# EAGLE board TSC_PROJECT_1_v12 (EAGLE 9.7.0)
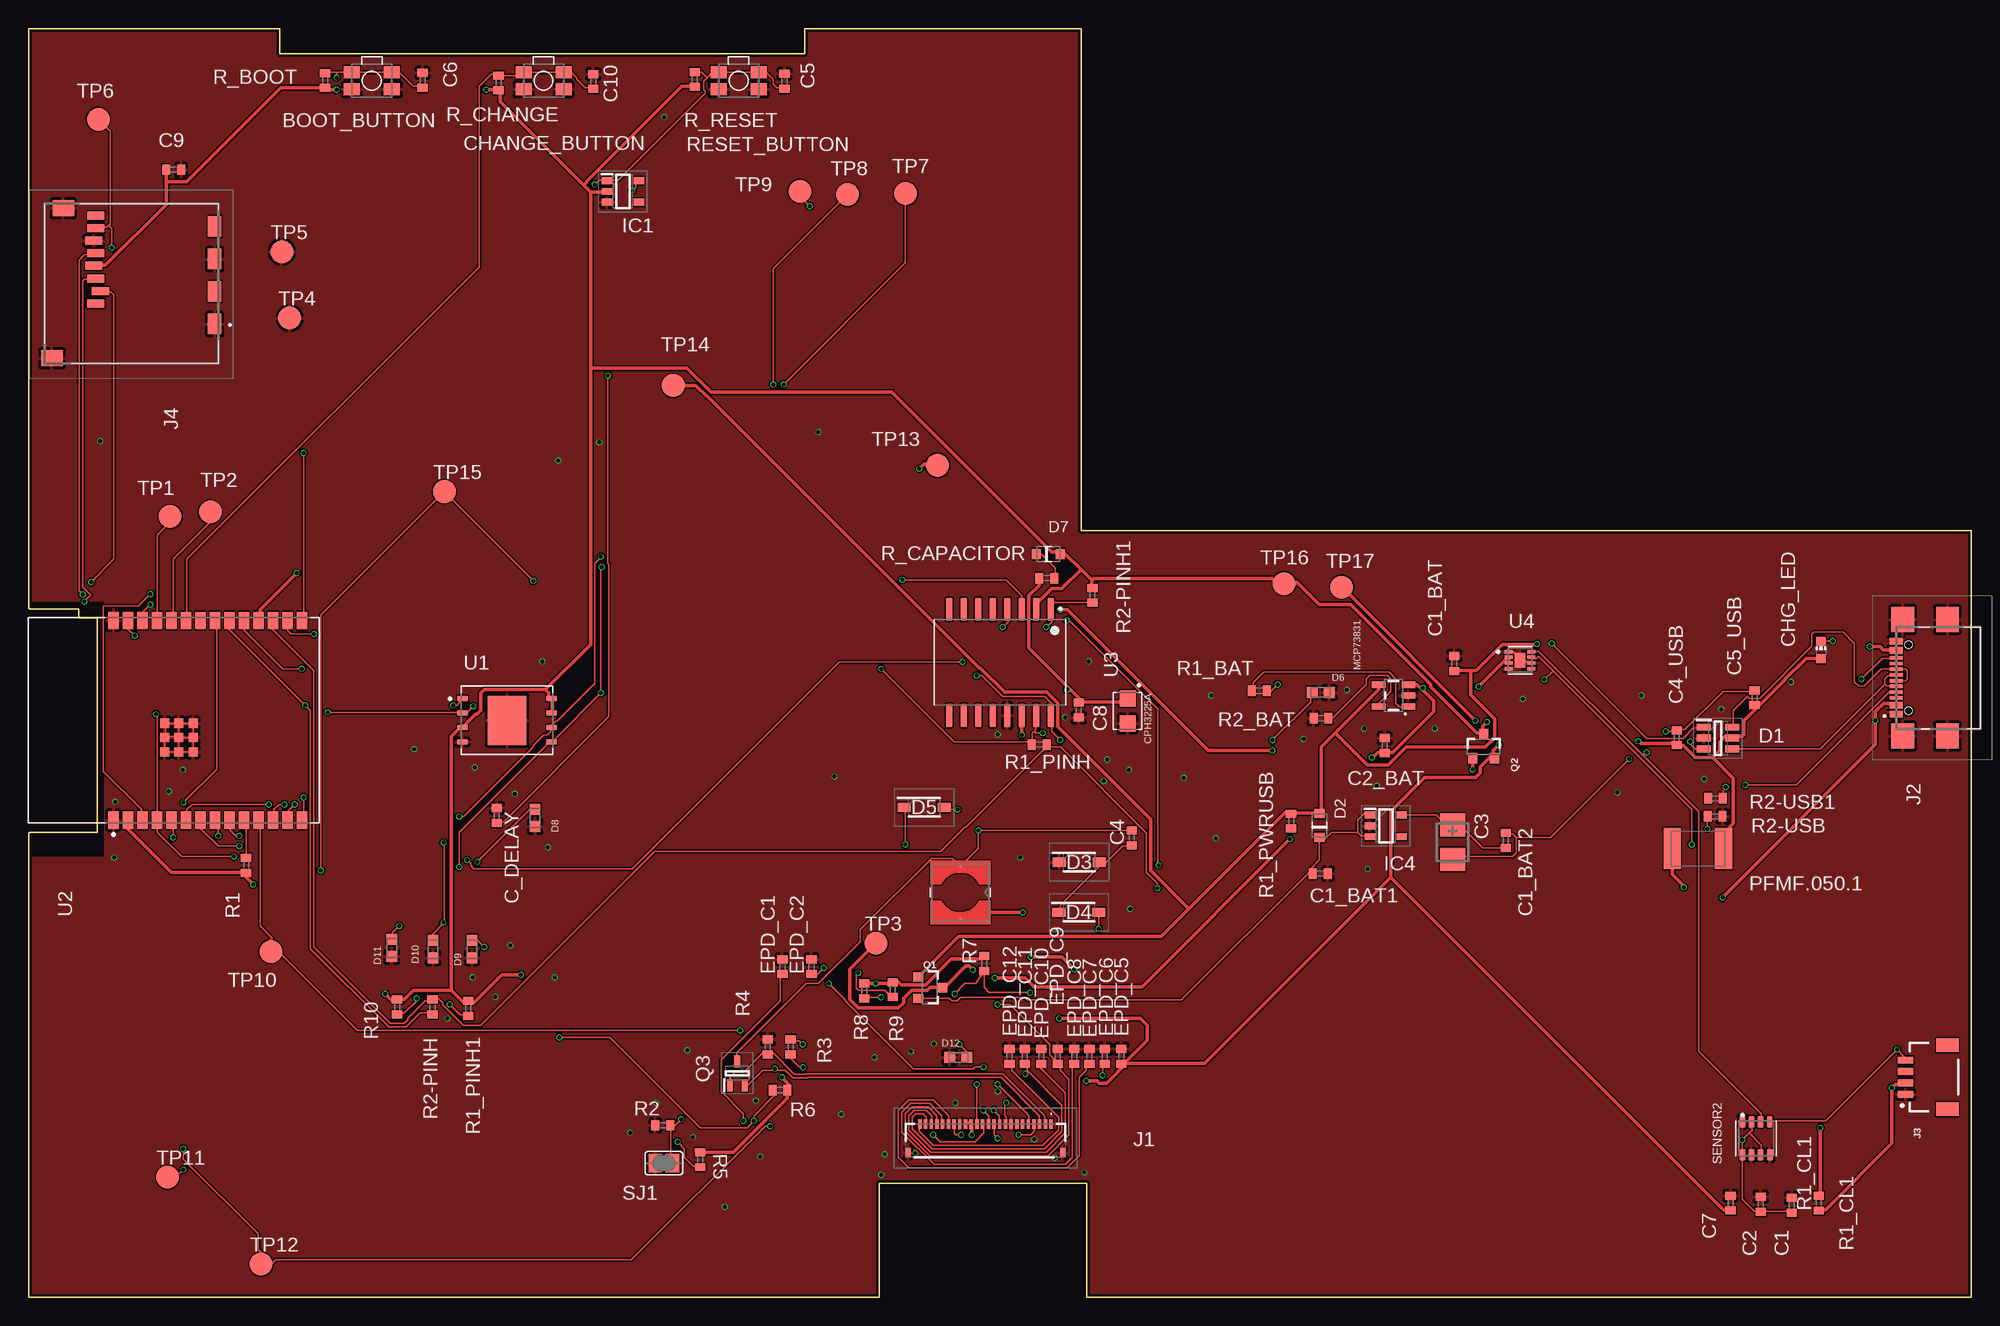
[diagram p0: board, top side]
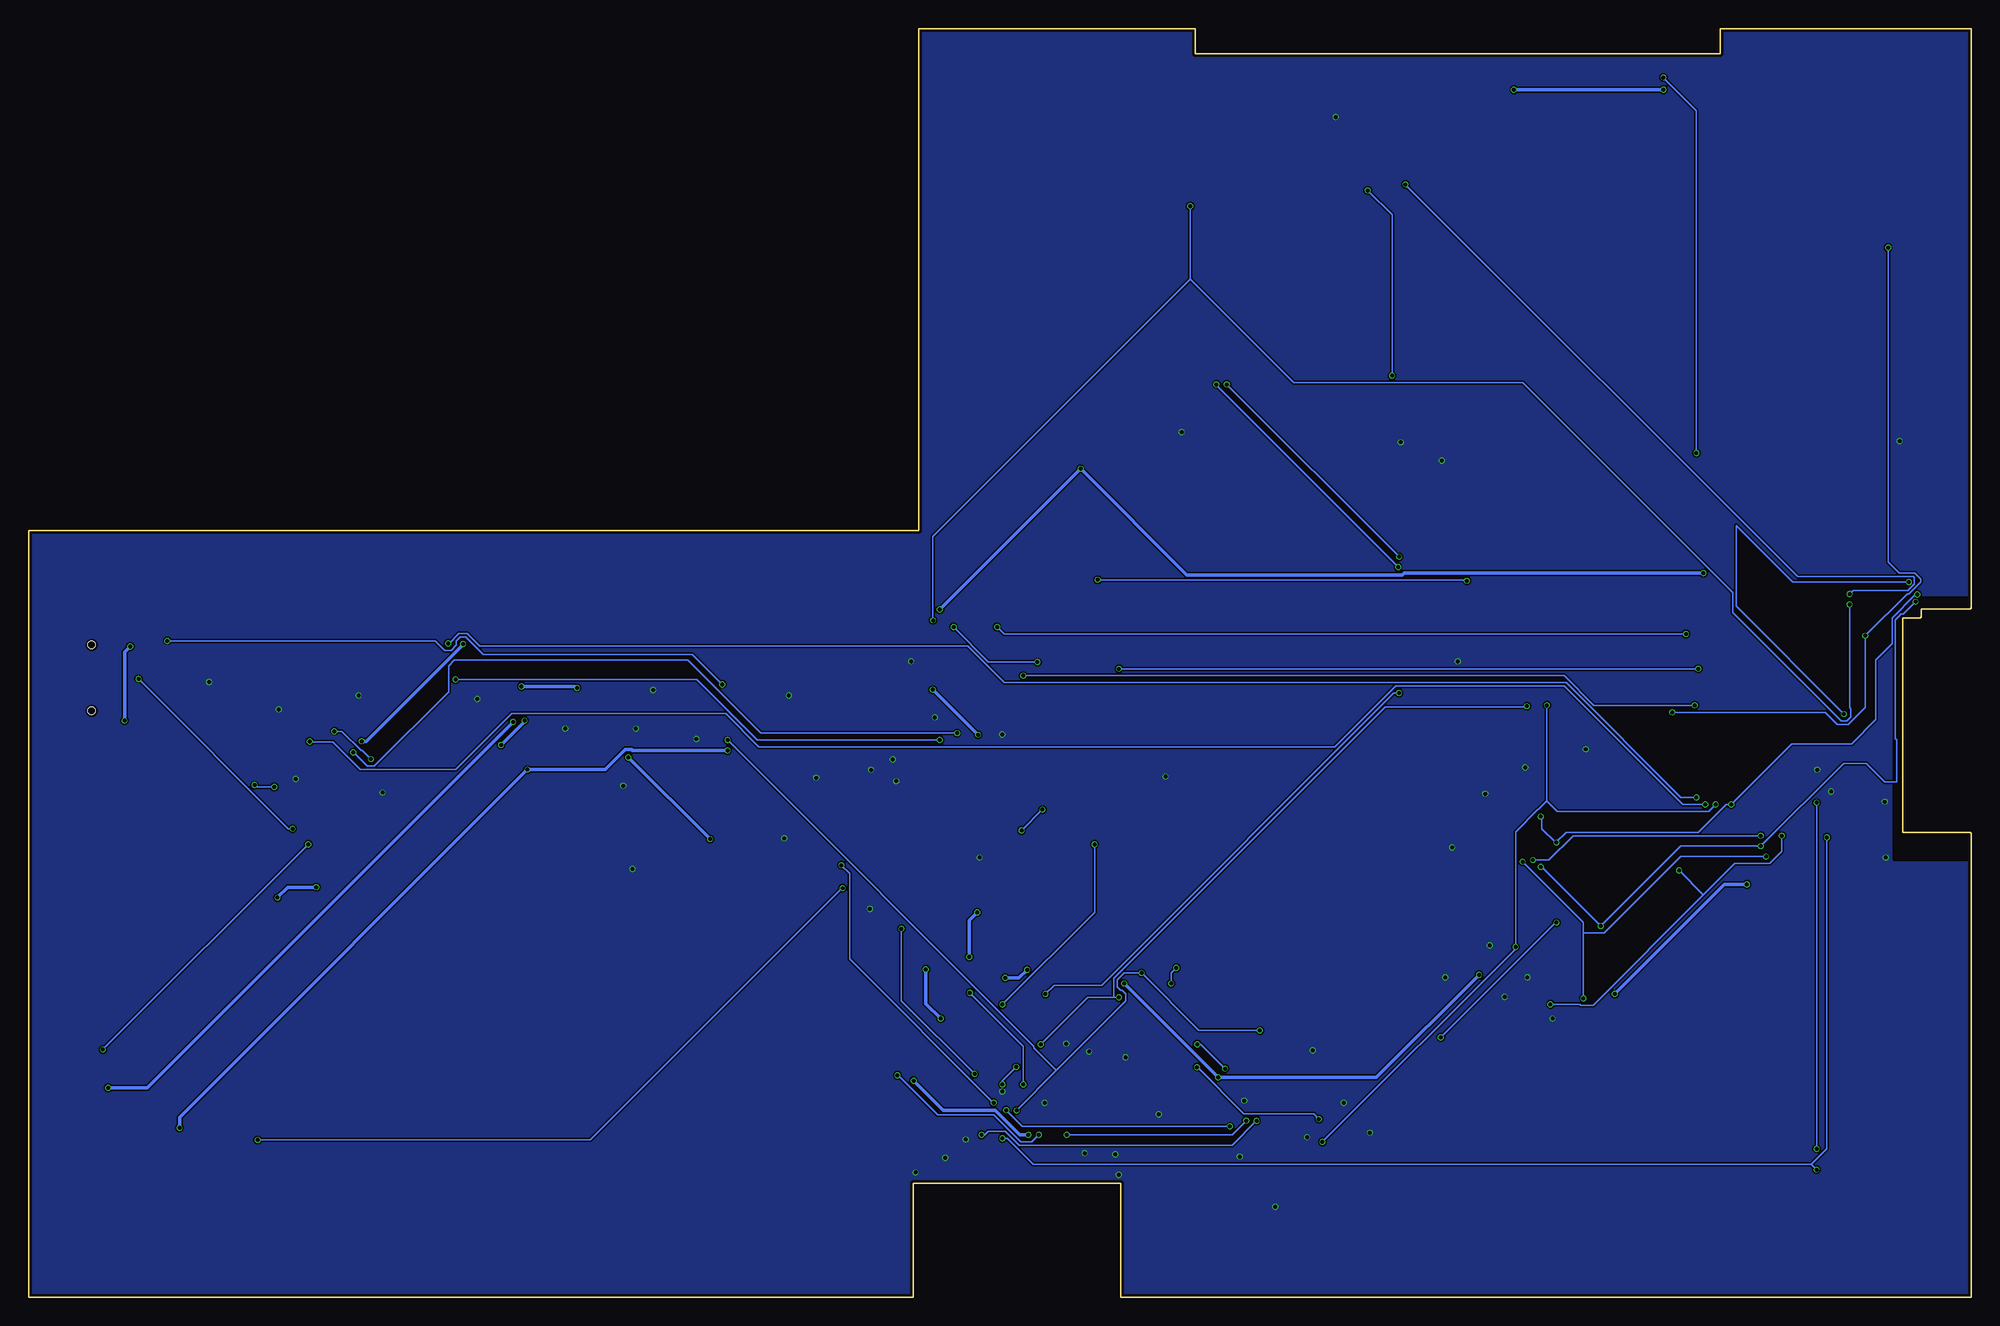
[diagram p1: board, bottom side, seen from below]

Size 170.21 x 111.2 mm. Coordinates in mm from the lower left corner, seen from the top.
Outline: 0.01,111.2 22.01,111.2 22.01,108.99 68.01,108.99 68.01,111.2 92.21,111.2 92.21,67.2 170.21,67.2 170.21,0 92.72,0 92.71,10 74.51,10 74.51,0 0.01,0 0,39.94 0,40.64 0.1,40.74 6,40.74 6,59.54 4.5,59.54 4.4,59.64 4.4,60.34 0.1,60.34 0.01,60.43 0.01,111.2
Copper layers (1*16): Top 0.035mm / dielectric 1.6mm / Bottom 0.035mm
Design rules "jlcpcb-2layers": minimum track width 5mil, minimum drill 0.3mm, track to track 5mil, track to pad 5mil, pad to pad 5mil, via to via 5mil, smd to smd 5mil, copper to edge 0.2mm, drill to drill 6mil, minimum pad ring 10mil, minimum via ring 3mil, stop-mask expansion 4mil, vias tented up to drill 0mil, thermal gap 10mil

## Footprints (pad centres in the part's own frame; a part is rotated, then mirrored left to right if it is on the bottom)
MYBUTTON = smd 1.4 x 1.05: 1 1.75,0.75; 2 -1.75,0.75; 3 -1.75,-0.75; 4 1.75,-0.75
EAGLE-LTSPICE_C0402 = smd 0.7 x 0.9: 1 -0.65,0; 2 0.65,0
RCL_CT3528 = smd 2 x 2.2: + -1.5,0; - 1.5,0
ADAFRUIT_CHIP-LED0603 = smd 0.8 x 0.8: A 0,-0.75; C 0,0.75
CAPCP3225X100N = smd 1.4 x 1.4: 1 -1.1,0; 2 1.1,0
SOT95P280X145-6N = smd 1.2 x 0.6: 1 -1.25,0.95; 2 -1.25,0; 3 -1.25,-0.95; 4 1.25,-0.95; 5 1.25,0; 6 1.25,0.95
ESP32_WROVER_AVX---SD0805S020S1R0_AVX_SD0805S020S1R0_0 = smd 0.8 x 0.9: 1 -1.05,0; 2 1.05,0
SOD3716X135N = smd 1.15 x 0.8: 1 -1.75,0; 2 1.75,0
DIOC1608X36N = smd 0.97 x 0.94: 1 -0.75,0; 2 0.75,0
SOT95P280X125-5N = smd 0.9 x 0.6: 1 -1.4,0.95; 2 -1.4,0; 3 -1.4,-0.95; 4 1.4,-0.95; 5 1.4,0.95
SOT95P280X120-5N = smd 0.9 x 0.6: 1 -1.4,0.95; 2 -1.4,0; 3 -1.4,-0.95; 4 1.4,-0.95; 5 1.4,0.95
FH34SRJ24S05SH99 = smd 0.3 x 0.8: 1 5.75,1.45; 2 5.25,1.45; 3 4.75,1.45; 4 4.25,1.45; 5 3.75,1.45; 6 3.25,1.45; 7 2.75,1.45; 8 2.25,1.45; 9 1.75,1.45; 10 1.25,1.45; 11 0.75,1.45; 12 0.25,1.45; 13 -0.25,1.45; 14 -0.75,1.45; 15 -1.25,1.45; 16 -1.75,1.45; 17 -2.25,1.45; 18 -2.75,1.45; 19 -3.25,1.45; 20 -3.75,1.45; 21 -4.25,1.45; 22 -4.75,1.45; 23 -5.25,1.45; 24 -5.75,1.45 | smd 0.4 x 0.8: MP1 6.75,-1.05; MP2 -6.75,-1.05
SAMACSYS_PARTS_USB4110GFA = smd 0.3 x 1.15: A1 -3.35,3.678; A4 -2.55,3.678; A5 -1.25,3.678; A6 -0.25,3.678; A7 0.25,3.678; A8 1.25,3.678; A9 2.55,3.678; A12 3.35,3.678; B1 3.05,3.678; B4 2.25,3.678; B5 1.75,3.678; B6 0.75,3.678; B7 -0.75,3.678; B8 -1.75,3.678; B9 -2.25,3.678; B12 -3.05,3.678 | smd 2.18 x 2: MP1 -5.11,-0.827; MP2 5.11,-0.827; MP3 -5.11,3.103; MP4 5.11,3.103 | hole 0.65: -2.89,2.603; 2.89,2.603
JST04_1MM_RA = smd 0.6 x 1.35: 1 -1.5,0; 2 -0.5,0; 3 0.5,0; 4 1.5,0 | smd 1.2 x 2: NC1 2.8,-3.675; NC2 -2.8,-3.675
112ATAARR03ATTEND = smd 1.8 x 1.2: G1 10.6,10.4; G2 4.9,10.4; S1 7.75,10.4; S2 2.05,10.4 | smd 1.4 x 1.9: G3 13.6,-3.85; G4 0.45,-2.85 | smd 0.7 x 1.5: P1 8.8,0; P2 7.7,0.4; P3 6.6,0; P4 5.5,-0.2; P5 4.4,0; P6 3.3,-0.2; P7 2.2,0; P8 1.1,0
IND_4828-WE-TPC_WRE = smd 0.127 x 0.127: 1 -2.286,0; 2 2.286,0
ESP32_WROVER_SPARKFUN-IC-POWER_SOT23-5 = smd 0.55 x 1.2: 1 -0.95,-1.3; 2 0,-1.3; 3 0.95,-1.3; 4 0.95,1.3; 5 -0.95,1.3
ESP32C6_VARISTOR_CT/CN1812 = smd 1.5 x 3.6: 1 -2.25,0; 2 2.25,0
ESP32_WROVER_SPARKFUN-DISCRETESEMI_SOT23-3 = smd 0.8 x 0.9: 1 -0.95,-1; 2 0.95,-1; 3 0,1.1
SOT65P210X110-3N = smd 1.05 x 0.5: 1 -1.05,0.65; 2 -1.05,-0.65; 3 1.05,0
ESP32_WROVER_EAGLE-LTSPICE_R0402 = smd 0.7 x 0.9: 1 -0.65,0; 2 0.65,0
ESP32_WROVER_BME680_PSON80P300X300X100-8N = smd 1.016 x 0.5: 1 1.458,1.2; 2 1.458,0.4; 3 1.458,-0.4; 4 1.458,-1.2; 5 -1.458,-1.22; 6 -1.458,-0.4; 7 -1.458,0.4; 8 -1.458,1.2
SJ = smd 1.168 x 1.6: 1 -0.762,0; 2 0.762,0
TP20R = smd 2 x 2: TP 0,0
SON127P600X800X80-9N = smd 0.94 x 0.44: 1 -3.895,1.905; 2 -3.895,0.635; 3 -3.895,-0.635; 4 -3.895,-1.905; 5 3.895,-1.905; 6 3.895,-0.635; 7 3.895,0.635; 8 3.895,1.905 | smd 3.4 x 4.3: 9 0,0
XCVR_ESP32-C6-WROOM-1-N8 = smd 1.5 x 0.9: 1 -8.75,5.26; 2 -8.75,3.99; 3 -8.75,2.72; 4 -8.75,1.45; 5 -8.75,0.18; 6 -8.75,-1.09; 7 -8.75,-2.36; 8 -8.75,-3.63; 9 -8.75,-4.9; 10 -8.75,-6.17; 11 -8.75,-7.44; 12 -8.75,-8.71; 13 -8.75,-9.98; 14 -8.75,-11.25; 15 8.75,-11.25; 16 8.75,-9.98; 17 8.75,-8.71; 18 8.75,-7.44; 19 8.75,-6.17; 20 8.75,-4.9; 21 8.75,-3.63; 22 8.75,-2.36; 23 8.75,-1.09; 24 8.75,0.18; 25 8.75,1.45; 26 8.75,2.72; 27 8.75,3.99; 28 8.75,5.26 | smd 0.8 x 0.8: 29_1 -2.755,0.79; 29_2 -1.505,0.79; 29_3 -0.255,0.79; 29_4 -2.755,-0.46; 29_5 -1.505,-0.46; 29_6 -0.255,-0.46; 29_7 -2.755,-1.71; 29_8 -1.505,-1.71; 29_9 -0.255,-1.71
SOIC127P1032X265-16N = smd 2.05 x 0.59: 1 -4.655,4.445; 2 -4.655,3.175; 3 -4.655,1.905; 4 -4.655,0.635; 5 -4.655,-0.635; 6 -4.655,-1.905; 7 -4.655,-3.175; 8 -4.655,-4.445; 9 4.655,-4.445; 10 4.655,-3.175; 11 4.655,-1.905; 12 4.655,-0.635; 13 4.655,0.635; 14 4.655,1.905; 15 4.655,3.175; 16 4.655,4.445
SON50P200X200X80-9N = smd 0.76 x 0.27: 1 -0.985,0.75; 2 -0.985,0.25; 3 -0.985,-0.25; 4 -0.985,-0.75; 5 0.985,-0.75; 6 0.985,-0.25; 7 0.985,0.25; 8 0.985,0.75 | smd 0.9 x 1.3: 9 0,0

## Placement (x,y rotation side)
BOOT_BUTTON  BUTTON_CUSYOMV1  [MYBUTTON]  30.07,106.62 180 top
C1  [EAGLE-LTSPICE_C0402]  154.46,8.07 90 top
C1_BAT  [EAGLE-LTSPICE_C0402]  124.9,55.56 90 top
C1_BAT1  [EAGLE-LTSPICE_C0402]  113.17,37.14 0 top
C1_BAT2  [EAGLE-LTSPICE_C0402]  129.41,40.04 90 top
C2  [EAGLE-LTSPICE_C0402]  151.75,8.17 90 top
C2_BAT  [EAGLE-LTSPICE_C0402]  118.81,48.36 90 top
C3  [RCL_CT3528]  124.76,39.89 270 top
C4  [EAGLE-LTSPICE_C0402]  96.64,40.27 90 top
C4_USB  [EAGLE-LTSPICE_C0402]  144.4,49.05 90 top
C5  [EAGLE-LTSPICE_C0402]  66.23,106.57 90 top
C5_USB  [EAGLE-LTSPICE_C0402]  151.21,52.55 90 top
C6  [EAGLE-LTSPICE_C0402]  34.52,106.67 90 top
C7  [EAGLE-LTSPICE_C0402]  149.11,8.27 90 top
C8  [EAGLE-LTSPICE_C0402]  92,51.47 270 top
C9  [EAGLE-LTSPICE_C0402]  12.71,98.83 0 top
C10  [EAGLE-LTSPICE_C0402]  49.47,106.56 90 top
C_DELAY  [EAGLE-LTSPICE_C0402]  41.01,42.24 90 top
CHANGE_BUTTON  BUTTON_CUSYOMV1  [MYBUTTON]  45.12,106.62 180 top
CHG_LED  [ADAFRUIT_CHIP-LED0603]  157.03,56.74 0 top
CPH3225A  CPH3225A  [CAPCP3225X100N]  96.28,51.39 270 top
D1  USBLC6-2SC6Y  [SOT95P280X145-6N]  148,49.02 0 top
D2  ESP32_WROVER_AVX---SD0805S020S1R0_AVX_SD0805S020S1R0_0_0AVX_SD0805S020S1R0_0_0  [ESP32_WROVER_AVX---SD0805S020S1R0_AVX_SD0805S020S1R0_0]  113.09,41.35 90 top
D3  MBR0530  [SOD3716X135N]  92.05,38.14 0 top
D4  MBR0530  [SOD3716X135N]  92.02,33.75 0 top
D5  MBR0530  [SOD3716X135N]  78.46,42.95 0 top
D6  PGB1010603MR  [DIOC1608X36N]  113.2,53.02 180 top
D7  ESP32_WROVER_AVX---SD0805S020S1R0_AVX_SD0805S020S1R0_0_0AVX_SD0805S020S1R0_0_0  [ESP32_WROVER_AVX---SD0805S020S1R0_AVX_SD0805S020S1R0_0]  89.34,65.15 0 top
D8  PGB1010603MR  [DIOC1608X36N]  44.38,42.02 90 top
D9  PGB1010603MR  [DIOC1608X36N]  38.86,30.52 90 top
D10  PGB1010603MR  [DIOC1608X36N]  35.44,30.52 90 top
D11  PGB1010603MR  [DIOC1608X36N]  31.82,30.62 90 top
D12  PGB1010603MR  [DIOC1608X36N]  81.45,21.03 0 top
EPD_C1  [EAGLE-LTSPICE_C0402]  66.05,28.98 90 top
EPD_C2  [EAGLE-LTSPICE_C0402]  68.59,28.98 90 top
EPD_C5  [EAGLE-LTSPICE_C0402]  95.72,21.13 90 top
EPD_C6  [EAGLE-LTSPICE_C0402]  94.28,21.13 90 top
EPD_C7  [EAGLE-LTSPICE_C0402]  92.94,21.13 90 top
EPD_C8  [EAGLE-LTSPICE_C0402]  91.6,21.13 90 top
EPD_C9  [EAGLE-LTSPICE_C0402]  90.16,21.13 90 top
EPD_C10  [EAGLE-LTSPICE_C0402]  88.72,21.13 90 top
EPD_C11  [EAGLE-LTSPICE_C0402]  87.28,21.13 90 top
EPD_C12  [EAGLE-LTSPICE_C0402]  85.94,21.13 90 top
IC1  BD5229G-TR  [SOT95P280X125-5N]  52.07,96.92 0 top
IC4  XC6220A331MR-G  [SOT95P280X120-5N]  118.91,41.32 0 top
J1  FH34SRJ-24S-0.5SH_99_  [FH34SRJ24S05SH99]  83.83,13.74 0 top
J2  SAMACSYS_PARTS_USB4110-GF-A  [SAMACSYS_PARTS_USB4110GFA]  167.29,54.3 90 top
J3  QWIIC_RIGHT_ANGLE  [JST04_1MM_RA]  164.44,19.3 90 top
J4  112A-TAAR-R03_ATTEND  [112ATAARR03ATTEND]  5.9,95.9 270 top
L1  744043680IND_4828-WE-TPC_WRE  [IND_4828-WE-TPC_WRE]  81.63,35.49 270 top
MCP73831  ESP32_WROVER_SPARKFUN-IC-POWER_MCP73831  [ESP32_WROVER_SPARKFUN-IC-POWER_SOT23-5]  119.58,52.74 90 top
PFMF.050.1  ESP32C6_VARISTORCN1812  [ESP32C6_VARISTOR_CT/CN1812]  146.24,39.33 0 top
Q1  20V/4.2A/52mΩ/1.4W  [ESP32_WROVER_SPARKFUN-DISCRETESEMI_SOT23-3]  78.95,27.15 270 top
Q2  20V/4.2A/52mΩ/1.4W  [ESP32_WROVER_SPARKFUN-DISCRETESEMI_SOT23-3]  127.47,48.25 0 top
Q3  SI1308EDL-T1-GE3  [SOT65P210X110-3N]  62.09,19.65 90 top
R1  [ESP32_WROVER_EAGLE-LTSPICE_R0402]  19.06,37.87 90 top
R1_BAT  [ESP32_WROVER_EAGLE-LTSPICE_R0402]  107.82,53.16 0 top
R1_CL1  [ESP32_WROVER_EAGLE-LTSPICE_R0402]  156.84,8.26 90 top
R1_PINH  [ESP32_WROVER_EAGLE-LTSPICE_R0402]  88.55,48.44 0 top
R1_PINH1  [ESP32_WROVER_EAGLE-LTSPICE_R0402]  38.52,25.33 90 top
R1_PWRUSB  [ESP32_WROVER_EAGLE-LTSPICE_R0402]  110.61,41.73 90 top
R2  [ESP32_WROVER_EAGLE-LTSPICE_R0402]  55.57,15.07 0 top
R2-PINH  [ESP32_WROVER_EAGLE-LTSPICE_R0402]  35.39,25.45 90 top
R2-PINH1  [ESP32_WROVER_EAGLE-LTSPICE_R0402]  93.2,61.53 90 top
R2-USB  [ESP32_WROVER_EAGLE-LTSPICE_R0402]  147.75,42.16 0 top
R2-USB1  [ESP32_WROVER_EAGLE-LTSPICE_R0402]  147.79,43.74 0 top
R2_BAT  [ESP32_WROVER_EAGLE-LTSPICE_R0402]  113.23,50.76 0 top
R3  [ESP32_WROVER_EAGLE-LTSPICE_R0402]  66.76,21.97 270 top
R4  [ESP32_WROVER_EAGLE-LTSPICE_R0402]  64.75,21.97 90 top
R5  [ESP32_WROVER_EAGLE-LTSPICE_R0402]  58.84,12.07 90.7 top
R6  [ESP32_WROVER_EAGLE-LTSPICE_R0402]  65.83,18.17 0 top
R7  [ESP32_WROVER_EAGLE-LTSPICE_R0402]  83.72,29.27 90 top
R8  [ESP32_WROVER_EAGLE-LTSPICE_R0402]  73.21,26.87 90 top
R9  [ESP32_WROVER_EAGLE-LTSPICE_R0402]  75.7,26.97 90 top
R10  [ESP32_WROVER_EAGLE-LTSPICE_R0402]  32.29,25.46 90 top
R_BOOT  [ESP32_WROVER_EAGLE-LTSPICE_R0402]  25.98,106.65 90 top
R_CAPACITOR  [ESP32_WROVER_EAGLE-LTSPICE_R0402]  89.21,63.03 0 top
R_CHANGE  [ESP32_WROVER_EAGLE-LTSPICE_R0402]  41.18,106.43 90 top
R_RESET  [ESP32_WROVER_EAGLE-LTSPICE_R0402]  58.36,106.73 90 top
RESET_BUTTON  BUTTON_CUSYOMV1  [MYBUTTON]  62.21,106.62 180 top
SENSOR2  ESP32_WROVER_BME680_BME680  [ESP32_WROVER_BME680_PSON80P300X300X100-8N]  151.34,13.94 90 top
SJ1  [SJ]  55.66,11.77 0 top
TP1  TPTP20R  [TP20R]  12.41,68.44 0 top
TP2  TPTP20R  [TP20R]  15.93,68.84 0 top
TP3  TPTP20R  [TP20R]  74.25,31.04 0 top
TP4  TPTP20R  [TP20R]  22.87,85.84 0 top
TP5  TPTP20R  [TP20R]  22.19,91.64 0 top
TP6  TPTP20R  [TP20R]  6.11,103.24 0 top
TP7  TPTP20R  [TP20R]  76.83,96.74 0 top
TP8  TPTP20R  [TP20R]  71.75,96.64 0 top
TP9  TPTP20R  [TP20R]  67.57,96.94 0 top
TP10  TPTP20R  [TP20R]  21.23,30.32 0 top
TP11  TPTP20R  [TP20R]  12.19,10.54 0 top
TP12  TPTP20R  [TP20R]  20.38,2.92 0 top
TP13  TPTP20R  [TP20R]  79.63,72.92 0 top
TP14  TPTP20R  [TP20R]  56.48,79.92 0 top
TP15  TPTP20R  [TP20R]  36.43,70.62 0 top
TP16  TPTP20R  [TP20R]  109.99,62.54 0 top
TP17  TPTP20R  [TP20R]  115.04,62.24 0 top
U1  W25Q512JVEIQ  [SON127P600X800X80-9N]  41.92,50.57 0 top
U2  ESP32-C6-WROOM-1-N8  [XCVR_ESP32-C6-WROOM-1-N8]  12.71,50.57 90 top
U3  DS3231SN#  [SOIC127P1032X265-16N]  85.1,55.65 270 top
U4  MAX17048G+T10  [SON50P200X200X80-9N]  130.67,55.84 0 top

## Library data of the parts
BOOT_BUTTON CHANGE_BUTTON CHG_LED PFMF.050.1 RESET_BUTTON SJ1 TP1-TP17 = DeskAssistant v19 v1
C1 C1_BAT C1_BAT1 C1_BAT2 C2 C2_BAT C4 C4_USB C5 C5_USB C6-C10 C_DELAY EPD_C1 EPD_C2 EPD_C5-EPD_C12 = DeskAssistant v19 v1; SPICEMODEL: NONE; SPICEPREFIX: C
C3 = DeskAssistant v19 v1; SPICEPREFIX: C
CPH3225A = DeskAssistant v19 v1; AVAILABILITY: Not in stock; CHECK_PRICES: https://www.snapeda.com/parts/CPH3225A/Seiko+Instruments/view-part/?ref=eda; DESCRIPTION: 11 mF (EDLC) Supercapacitor 3.3 V 1210 (3225 Metric) - -; MF: Seiko Instruments; MP: CPH3225A; PACKAGE: 1210 Seiko; PRICE: None; PURCHASE-URL: https://www.snapeda.com/api/url_track_click_mouser/?unipart_id=562593&manufacturer=Seiko Instruments&part_name=CPH3225A&search_term=None; SNAPEDA_LINK: https://www.snapeda.com/parts/CPH3225A/Seiko+Instruments/view-part/?ref=snap
D1 = DeskAssistant v19 v1; AVAILABILITY: In Stock; CHECK_PRICES: https://www.snapeda.com/parts/USBLC6-2SC6Y/STMicroelectronics/view-part/?ref=eda; DESCRIPTION: 17V Clamp 5A (8/20µs) Ipp Tvs Diode Surface Mount SOT-23-6; MF: STMicroelectronics; MP: USBLC6-2SC6Y; PACKAGE: SOT-23-6 STMicroelectronics; PRICE: None; SNAPEDA_LINK: https://www.snapeda.com/parts/USBLC6-2SC6Y/STMicroelectronics/view-part/?ref=snap
D2 D7 = DeskAssistant v19 v1; CENTROID_NOT_SPECIFIED: No; DATASHEET: http://datasheets.avx.com/schottky.pdf; DIGIKEY_DESCRIPTION: DIODE SCHOTTKY 20V 1A 0805; DIGIKEY_PART_NUMBER: 478-7800-1-ND; LEAD_FREE: yes; MF: AVX; MOUSER_PART_NUMBER: 581-SD0805S020S1R0; PACKAGE: 0805 (2012 metric); PREFIX: D; ROHS: yes; TEMPERATURE_RANGE_HIGH: +125°C; TEMPERATURE_RANGE_LOW: -55°C
D3-D5 = DeskAssistant v19 v1; AVAILABILITY: In Stock; CHECK_PRICES: https://www.snapeda.com/parts/MBR0530/Onsemi/view-part/?ref=eda; DESCRIPTION: Diode Schottky 30 V 500mA Surface Mount SOD-123; MF: ON Semiconductor; MP: MBR0530; PACKAGE: SOD-123-2 ON Semiconductor; PRICE: None; PURCHASE-URL: https://www.snapeda.com/api/url_track_click_mouser/?unipart_id=179458&manufacturer=ON Semiconductor&part_name=MBR0530&search_term=None; SNAPEDA_LINK: https://www.snapeda.com/parts/MBR0530/Onsemi/view-part/?ref=snap
D6 D8-D12 = DeskAssistant v19 v1; AVAILABILITY: In Stock; CHECK_PRICES: https://www.snapeda.com/parts/PGB1010603MR/Littelfuse/view-part/?ref=eda; DESCRIPTION: 150V (Typ) Clamp - Ipp Tvs Diode Surface Mount 0603 (1608 Metric); MF: Littelfuse Inc.; MP: PGB1010603MR; PACKAGE: 0603 Littelfuse Inc.; PRICE: None; PURCHASE-URL: https://www.snapeda.com/api/url_track_click_mouser/?unipart_id=5659453&manufacturer=Littelfuse Inc.&part_name=PGB1010603MR&search_term=None; SNAPEDA_LINK: https://www.snapeda.com/parts/PGB1010603MR/Littelfuse/view-part/?ref=snap
IC1 = DeskAssistant v19 v1; DESCRIPTION: Voltage Detector with Adjustable Delay Time: CMOS processes are utilized to develop high precision, low current consumption CMOS reset ICs that allow arbitrary setting of the delay time. The extensive lineup includes both Nch Open Drain and CMOS output types in a wide range of detection voltages (from 2.3V to 6.0V, in 0.1V steps), enabling selection of the ideal solution based on customer requirements. In addition, the entire series is of course both lead-free and RoHS-compliant.; HEIGHT: 1.25mm; MANUFACTURER_NAME: ROHM Semiconductor; MANUFACTURER_PART_NUMBER: BD5229G-TR; MOUSER_PART_NUMBER: 755-BD5229G-TR; MOUSER_PRICE-STOCK: https://www.mouser.co.uk/ProductDetail/ROHM-Semiconductor/BD5229G-TR?qs=4kLU8WoGk0vvnhrrYwdszw%3D%3D
IC4 = DeskAssistant v19 v1; DESCRIPTION: LDO Voltage Regulators; HEIGHT: 1.2mm; MANUFACTURER_NAME: Torex; MANUFACTURER_PART_NUMBER: XC6220A331MR-G; MOUSER_PART_NUMBER: 865-XC6220A331MR-G; MOUSER_PRICE-STOCK: https://www.mouser.co.uk/ProductDetail/Torex-Semiconductor/XC6220A331MR-G?qs=AsjdqWjXhJ8ZSWznL1J0gg%3D%3D
J1 = DeskAssistant v19 v1; DESCRIPTION: 24 Position FFC, FPC Connector Contacts, Top and Bottom 0.020" (0.50mm) Surface Mount, Right Angle; HEIGHT: 1.1mm; MANUFACTURER_NAME: Hirose; MANUFACTURER_PART_NUMBER: FH34SRJ-24S-0.5SH(99); MOUSER_PART_NUMBER: 798-FH34SRJ24S05SH99; MOUSER_PRICE-STOCK: https://www.mouser.co.uk/ProductDetail/Hirose-Connector/FH34SRJ-24S-0.5SH99?qs=vcbW%252B4%252BSTIpKBl5ap9J8Fw%3D%3D
J2 = DeskAssistant v19 v1; DESCRIPTION: CONN USB 2.0 TYPE-C R/A SMT; HEIGHT: 3.26mm; MANUFACTURER_NAME: GCT (GLOBAL CONNECTOR TECHNOLOGY); MANUFACTURER_PART_NUMBER: USB4110-GF-A; MOUSER_PART_NUMBER: 640-USB4110-GF-A; MOUSER_PRICE-STOCK: https://www.mouser.co.uk/ProductDetail/GCT/USB4110-GF-A?qs=KUoIvG%2F9IlYiZvIXQjyJeA%3D%3D
J3 = DeskAssistant v19 v1; PROD_ID: CONN-13694
J4 = DeskAssistant v19 v1; DESCRIPTION: Micro SD Card Socket, Push-Push Type, Top Mount, SMT, H=1.83mm, 10u; HEIGHT: 1.9mm; MANUFACTURER_NAME: ATTEND; MANUFACTURER_PART_NUMBER: 112A-TAAR-R03 ATTEND
L1 = DeskAssistant v19 v1; COPYRIGHT: Copyright (C) 2024 Ultra Librarian. All rights reserved.; MANUFACTURER_PART_NUMBER: 744043680; MFR_NAME: Wurth Electronics
MCP73831 = DeskAssistant v19 v1; PROD_ID: IC-09995
Q1 Q2 = DeskAssistant v19 v1; PROD_ID: TRAN-14388
Q3 = DeskAssistant v19 v1; AVAILABILITY: In Stock; CHECK_PRICES: https://www.snapeda.com/parts/SI1308EDL-T1-GE3/Vishay+Siliconix/view-part/?ref=eda; DESCRIPTION: Si1308EDL-T1-GE3 N-channel MOSFET Transistor, 1.5 A, 30 V, 3-Pin SC-70 | Siliconix / Vishay SI1308EDL-T1-GE3; MF: Vishay Siliconix; MP: SI1308EDL-T1-GE3; PACKAGE: SOT-323 Vishay Semiconductor; PRICE: None; PURCHASE-URL: https://www.snapeda.com/api/url_track_click_mouser/?unipart_id=274603&manufacturer=Vishay Siliconix&part_name=SI1308EDL-T1-GE3&search_term=None; SNAPEDA_LINK: https://www.snapeda.com/parts/SI1308EDL-T1-GE3/Vishay+Siliconix/view-part/?ref=snap
R1 R1_BAT R1_CL1 R1_PINH R1_PINH1 R1_PWRUSB R2 R2-PINH R2-PINH1 R2-USB R2-USB1 R2_BAT R3-R10 R_BOOT R_CAPACITOR R_CHANGE R_RESET = DeskAssistant v19 v1; SPICEMODEL: NONE; SPICEPREFIX: R
SENSOR2 = DeskAssistant v19 v1; AVAILABILITY: Unavailable; DESCRIPTION: Integrated Environmental Unit; MF: Bosch Sensortec; MP: BME680; PACKAGE: LGA-8 Bosch Tools; PRICE: None
U1 = DeskAssistant v19 v1; AVAILABILITY: In Stock; CHECK_PRICES: https://www.snapeda.com/parts/W25Q512JVEIQ/Winbond+Electronics/view-part/?ref=eda; DESCRIPTION: FLASH - NOR Memory IC 512Mb (64M x 8) SPI - Quad I/O 133 MHz 8-WSON (8x6); MF: Winbond Electronics; MP: W25Q512JVEIQ; PACKAGE: Package; PRICE: None; SNAPEDA_LINK: https://www.snapeda.com/parts/W25Q512JVEIQ/Winbond+Electronics/view-part/?ref=snap
U2 = DeskAssistant v19 v1; AVAILABILITY: In Stock; CHECK_PRICES: https://www.snapeda.com/parts/ESP32-C6-WROOM-1-N8/Espressif+Systems/view-part/?ref=eda; DESCRIPTION: Multiprotocol Modules ESP32-C6 module, Wi-Fi 6 in 2.4 GHz band, Bluetooth 5, Zigbee 3.0 and Thread. ESP34-WROOM Compatible - ENGINEERING SAMPLE; MF: Espressif Systems; MP: ESP32-C6-WROOM-1-N8; PACKAGE: None; PRICE: None; SNAPEDA_LINK: https://www.snapeda.com/parts/ESP32-C6-WROOM-1-N8/Espressif+Systems/view-part/?ref=snap
U3 = DeskAssistant v19 v1; AVAILABILITY: In Stock; CHECK_PRICES: https://www.snapeda.com/parts/DS3231SN%23/Analog+Devices/view-part/?ref=eda; DESCRIPTION: Extremely Accurate I²C-Integrated RTC/TCXO/Crystal; MF: Analog Devices; MP: DS3231SN#; PACKAGE: SOIC-16 Maxim; PRICE: None; PURCHASE-URL: https://www.snapeda.com/api/url_track_click_mouser/?unipart_id=99048&manufacturer=Analog Devices&part_name=DS3231SN#&search_term=None; SNAPEDA_LINK: https://www.snapeda.com/parts/DS3231SN%23/Analog+Devices/view-part/?ref=snap
U4 = DeskAssistant v19 v1; AVAILABILITY: In Stock; CHECK_PRICES: https://www.snapeda.com/parts/MAX17048G+T10/Analog+Devices/view-part/?ref=eda; DESCRIPTION: 3µA 1-Cell/2-Cell Fuel Gauge with ModelGauge; MF: Analog Devices; MP: MAX17048G+T10; PACKAGE: TDFN-8 Maxim; PRICE: None; PURCHASE-URL: https://www.snapeda.com/api/url_track_click_mouser/?unipart_id=329239&manufacturer=Analog Devices&part_name=MAX17048G+T10&search_term=None; SNAPEDA_LINK: https://www.snapeda.com/parts/MAX17048G+T10/Analog+Devices/view-part/?ref=snap

## Nets
3V3: C9.1 D7.2 IC1.2 J3.2 J4.P4 Q2.3 R1.1 R1_CL1.1 R1_PINH1.2 R2-PINH1.2 R5.2 R6.2 R7.2 R8.2 R9.2 R10.2 R_BOOT.1 R_CHANGE.1 R_RESET.1 TP16.TP U1.3 U1.7 U1.8 U2.2 U3.2
4.7UF: C1_BAT2.2 C3.- C4_USB.2 C5_USB.2
32KHZ: R2-PINH1.1 U2.9 U3.1
100K: R1_PWRUSB.1
100UFTANT: C1_BAT2.1 C3.+ IC4.5
DN: D1.4 J2.A7 J2.B7
DP: D1.6 J2.A6 J2.B6
EPD_3V3: C7.1 EPD_C5.1 J1.15 J1.16 L1.2 Q2.2 TP17.TP
EPD_3V3_C: Q2.1 R1_CL1.2 TP13.TP U2.18
EPD_BUSY: J1.9 TP9.TP U2.26
EPD_CS: D6.2 J1.12 R9.1 TP10.TP U2.11
EPD_DC: J1.11 TP11.TP U2.5
EPD_RST: J1.10 TP12.TP U2.21
FLASH_CS: D9.2 R5.1 U1.1 U2.12
GDR: J1.2 Q3.1 R4.1
GND: BOOT_BUTTON.1 BOOT_BUTTON.2 C1.2 C1_BAT1.2 C1_BAT.2 C2.2 C2_BAT.2 C5.2 C6.2 C7.2 C8.2 C9.2 C10.2 C_DELAY.2 CHANGE_BUTTON.1 CHANGE_BUTTON.2 CPH3225A.2 D1.2 D3.1 D6.1 D8.1 D9.1 D10.1 D11.1 D12.1 EPD_C1.2 EPD_C2.2 EPD_C5.2 EPD_C6.2 EPD_C7.2 EPD_C8.2 EPD_C9.2 EPD_C10.2 EPD_C11.2 EPD_C12.2 IC1.3 IC4.2 J1.8 J1.17 J1.MP1 J1.MP2 J2.A12 J2.B1 J2.B12 J2.MP1 J2.MP2 J2.MP3 J2.MP4 J3.1 J4.G1 J4.G2 J4.G3 J4.G4 J4.P6 MCP73831.2 R2-USB.2 R2.1 R2_BAT.1 R4.2 RESET_BUTTON.1 RESET_BUTTON.2 SENSOR2.1 SENSOR2.5 SENSOR2.7 SJ1.1 TP4.TP TP5.TP U1.4 U1.9 U2.1 U2.28 U2.29_1 U2.29_2 U2.29_3 U2.29_4 U2.29_5 U2.29_6 U2.29_7 U2.29_8 U2.29_9 U3.13 U4.1 U4.4 U4.6 U4.9
GPIO8: R1.2 U2.10
I2C_PW: C1.1 C2.1 R1_PINH.2 R2-PINH.2 SENSOR2.2 SENSOR2.6 SENSOR2.8 U2.17
INT_RTC: R1_PINH1.1 TP15.TP U2.8 U3.3
IO/BOOT: BOOT_BUTTON.3 BOOT_BUTTON.4 C6.1 R_BOOT.2 U2.15
IO/CHANGE: C10.1 CHANGE_BUTTON.3 CHANGE_BUTTON.4 R_CHANGE.2 U2.23
MISO: D12.2 J4.P7 R8.1 TP6.TP U1.2 U2.27
MOSI: D11.2 J1.14 J4.P3 R7.1 TP7.TP U1.5 U2.7
N$1: J2.A1
N$2: J2.A5 R2-USB1.2
N$3: J2.B5 R2-USB.1
N$4: C4.1 D3.2 D4.1
N$6: MCP73831.1 R1_BAT.1
N$7: CHG_LED.C R1_BAT.2
N$8: MCP73831.5 R2_BAT.2
N$9: EPD_C12.1 J1.24
N$10: EPD_C2.1 J1.5
N$11: EPD_C10.1 J1.22
N$12: C_DELAY.1 IC1.5
N$13: EPD_C8.1 J1.20
N$14: EPD_C7.1 J1.19
N$15: EPD_C6.1 J1.18
N$16: EPD_C1.1 J1.4
N$17: D7.1 R_CAPACITOR.2
PREVGH: D5.1 EPD_C9.1 J1.21
PREVGL: D4.2 EPD_C11.1 J1.23
R2-USB1: R2-USB1.1
RESE: J1.3 Q3.2 R3.1
RESE': R2.2 R3.2 SJ1.2
RESET: C5.1 IC1.1 R_RESET.2 RESET_BUTTON.3 RESET_BUTTON.4 U2.3
RTC_RST: U2.16 U3.4
RX: TP2.TP U2.24
SCA: J3.3
SCK: D10.2 J1.13 J4.P5 R6.1 TP8.TP U1.6 U2.6
SCL: J3.4 R2-PINH.1 SENSOR2.4 U2.20 U3.16 U4.7
SD0805S020S1R0: C1_BAT1.1 D2.1 IC4.1 IC4.3 Q1.2
SDA: R1_PINH.1 SENSOR2.3 U2.19 U3.15 U4.8
SRC: C4.2 D5.2 L1.1 Q3.3
SS_SD: D8.2 J4.P2 R10.1 U2.4
TX: TP1.TP U2.25
USB_D+: D1.1 U2.14
USB_D-: D1.3 U2.13
VBAT: C2_BAT.1 MCP73831.3 Q1.3 TP3.TP U4.2 U4.3
VBUS: C1_BAT.1 C4_USB.1 C5_USB.1 CHG_LED.A D1.5 D2.2 MCP73831.4 PFMF.050.1.2 Q1.1 R1_PWRUSB.2 TP14.TP
VRTC: C8.1 CPH3225A.1 R_CAPACITOR.1 U3.14
VUSB: J2.A4 J2.A9 J2.B4 J2.B9 PFMF.050.1.1

## Tracks (layer width: path | path; a pad name or v marks a point on that pad's centre or on a via)
3V3  (via drill 0.35)
  Top 0.305: R1_CL1.1 156.98,7.7 157.44,7.7 163.23,13.49 v163.23,18.36 163.53,18.67 164.3,18.67 J3.2 | 93.13,62.86 93.13,62.25 R2-PINH1.2 | 92.21,63.78 90.84,65.15 90.54,65.15 D7.2 90.38,65.3 89.62,65.3 75.6,79.32 59.79,79.32 57.65,81.46 49.23,81.46 | 92.21,63.78 93.13,62.86 | 92.21,63.78 90.54,62.1 89.63,62.1 88.28,60.74 U3.2 | 93.13,62.86 93.28,63.02 108.98,63.02 109.43,62.56 109.89,62.56 TP16.TP 110.04,62.56 110.96,62.56 111.11,62.71 113.09,60.73 115.83,60.73 122.84,53.72 122.84,53.49 126.88,49.45 127.42,49.45 | 127.42,49.45 Q2.3 | 49.23,96.85 48.63,97.46 | 48.63,97.46 41.31,104.77 41.31,105.69 R_CHANGE.1 41.16,105.84 v40.09,105.84 | 49.23,96.85 50.61,96.85 IC1.2 | R_RESET.1 58.23,106.15 57.24,106.15 48.91,97.81 48.91,97.74 48.63,97.46 | 12.05,97.76 12.05,95.78 6.72,90.45 5.8,90.45 J4.P4 | 12.05,97.76 C9.1 | 12.05,97.76 13.88,97.76 22.11,105.99 25.92,105.99 R_BOOT.1 26.07,105.99 26.22,105.84 v26.98,105.84 | R8.2 73.31,27.51 v74.23,27.51 75.6,27.51 R9.2 75.75,27.66 76.21,27.66 76.47,27.39 78.58,27.39 80.84,29.66 83.46,29.66 R7.2 | R5.2 61.73,12.72 66.46,17.45 66.46,18.06 R6.2 66.61,18.21 66.61,18.67 v66,19.28 | U2.2 8.7,41.68 8.7,41.07 12.51,37.26 19.06,37.26 R1.1 19.06,36.8 v19.67,36.19 | 37.04,26.9 33.69,26.9 32.93,26.14 32.32,26.14 R10.2 32.17,25.98 31.86,25.98 v31.25,26.59 | 37.04,26.9 38.11,25.83 38.42,25.83 R1_PINH1.2 38.57,25.83 39.02,25.83 41.46,28.27 v43.14,28.27 | 45.27,53.26 39.94,53.26 39.63,52.96 39.63,51.43 39.33,51.13 39.18,51.13 38.11,50.06 U1.3 37.96,50.06 37.04,49.15 37.04,26.9 | 45.27,53.26 45.58,52.96 45.58,52.5 45.73,52.35 U1.8 45.88,52.35 45.88,51.28 U1.7
  Top 0.305: 49.23,81.46 49.23,57.23 45.27,53.26 | 49.23,81.46 49.23,96.85 | v127.76,50.43 127.42,50.08 127.42,49.45
  Bottom 0.305: v26.98,105.84 v40.09,105.84 | v74.23,27.51 v66,19.28 52.13,19.28 v43.14,28.27 | v19.67,36.19 21.65,36.19 v31.25,26.59 | v127.76,50.43 159.82,18.36 v163.23,18.36
4.7UF  (via drill 0.35)
  Top 0.152: 130.31,40.31 130.01,40.61 129.55,40.61 C1_BAT2.2 | 130.31,40.31 130.31,38.94 130.01,38.63 124.98,38.63 124.83,38.48 C3.- | C5_USB.2 151.19,53.11 148.45,53.11 145.09,49.76 144.48,49.76 C4_USB.2 144.33,49.61 v143.42,49.61 | 130.31,40.31 133.36,40.31 v140.22,47.17
  Bottom 0.152: v140.22,47.17 140.98,47.93 141.08,47.93 142.75,49.61 v143.42,49.61
32KHZ  (via drill 0.35)
  Top 0.152: R2-PINH1.1 93.13,60.88 89.77,60.88 89.62,60.73 89.62,60.42 U3.1 89.62,60.27 89.62,59.21 v89.16,58.75 | v18.45,40.46 18.15,40.46 17.69,40.92 17.69,41.68 U2.9 | v38.42,38.33 38.72,38.02 38.72,37.87 39.02,37.56 52.89,37.56 71.03,55.7 81.8,55.7 v81.82,55.67
  Bottom 0.152: v89.16,58.75 86.12,55.7 81.85,55.7 v81.82,55.67 | v18.45,40.46 34.89,40.46 37.03,38.33 v38.42,38.33
100UFTANT
  Top 0.152: IC4.5 120.41,42.29 123.3,42.29 124.06,41.53 124.67,41.53 C3.+ 124.83,41.38 125.44,41.38 127.42,39.39 129.4,39.39 C1_BAT2.1
DN
  Top 0.152: 162.62,53.72 162.77,53.57 163.53,53.57 J2.B7 | 162.62,53.72 162.62,54.18 162.93,54.48 163.53,54.48 J2.A7 | 162.62,53.72 156.98,48.08 149.36,48.08 D1.4
DP
  Top 0.152: J2.A6 163.69,54.02 164.45,54.02 164.6,54.18 164.6,54.94 164.45,55.09 163.69,55.09 J2.B6 163.53,55.09 162.32,55.09 160.82,53.59 160.32,53.59 159.96,53.95 159.96,57.29 158.96,58.29 156.37,58.29 156.22,58.14 156.22,57.07 151.65,52.5 150.73,52.5 150.58,52.65 149.36,51.43 149.36,50.06 D1.6
EPD_3V3  (via drill 0.35)
  Top 0.305: J1.16 82.15,15.32 82.46,15.32 J1.15 82.61,15.16 v82.61,14.25 | 119.34,36.8 148.45,7.7 149.06,7.7 C7.1 | 119.34,36.8 119.34,42.59 122.31,45.57 126.79,45.57 127.19,45.97 127.19,46.48 128.03,47.32 128.33,47.32 | 96.17,20.5 103.03,20.5 119.34,36.8 | 96.17,20.5 95.87,20.5 EPD_C5.1 95.94,20.48 98,22.54 98,23.84 97.4,24.44 v90.3,24.44 | TP17.TP 115.07,62.1 115.53,61.64 115.68,61.64 126.76,50.57 v126.76,50.55 | 128.33,47.32 Q2.2 | 128.33,47.32 128.33,47.92 v128.81,48.41 | v92.67,18.97 93.61,18.97 93.81,18.77 94.45,18.77 96.17,20.5 | L1.2 82.17,33.74 v87.1,33.74 | v87.8,29.84 90.5,29.84 v91.6,28.74
  Bottom 0.305: v82.61,14.25 83.37,14.25 85.51,16.38 90.08,16.38 v92.67,18.97 | v128.81,48.41 126.83,50.39 126.83,50.47 v126.76,50.55 | v87.1,33.74 87.8,33.04 v87.8,29.84 | v91.6,28.74 91.6,25.74 v90.3,24.44
EPD_3V3_C  (via drill 0.35)
  Top 0.305: v156.98,14.86 156.98,8.91 R1_CL1.2 | v126.5,46.25 126.5,47.17 Q2.1 | v23.48,63.47 20.28,60.27 20.28,59.36 U2.18 | v78.04,72.62 78.5,73.07 78.65,72.92 79.56,72.92 TP13.TP | v108.98,47.93 103.34,47.93 90.99,60.27 v90.38,60.27
  Bottom 0.305: v156.98,14.86 156.98,15.77 v126.5,46.25 119.7,46.25 117.95,48 117.38,48 117.3,47.93 v108.98,47.93 | v23.48,63.47 49.69,63.47 49.85,63.32 68.74,63.32 v78.04,72.62 v90.38,60.27
EPD_BUSY  (via drill 0.35)
  Top 0.152: v68.44,95.63 67.68,96.39 67.68,96.85 TP9.TP | J1.9 85.66,15.32 85.66,15.77 85.51,15.92 85.51,16.84 85.66,16.99 v85.66,17.07 | v10.68,60.73 10.07,60.12 10.07,59.36 U2.26 | v90.97,59.33 91.16,59.33 98.92,51.58 98.92,37.94 v98.99,37.87
  Bottom 0.152: v68.44,95.63 68.44,89.23 | 68.44,89.23 59.38,80.17 39.32,80.17 20.93,61.78 20.93,60.02 11.42,50.51 10.92,50.51 10.56,50.86 10.56,51.56 10.68,51.68 v10.68,60.73 | v85.66,17.07 85.68,17.07 98.28,29.67 98.28,37.16 v98.99,37.87 | 68.44,89.23 90.99,66.68 90.99,59.36 v90.97,59.33
EPD_CS  (via drill 0.35)
  Top 0.152: U2.11 20.28,41.68 20.28,32.54 21.35,31.47 21.19,31.32 21.19,30.4 TP10.TP 21.35,30.25 21.96,30.25 28.81,23.39 v62.34,23.39 | J1.12 84.14,15.32 84.14,15.9 v83.66,16.38 | R9.1 75.6,26.29 74.99,26.9 72.71,26.9 72.53,27.07 72.53,28.25 v72.7,28.42 | v108.98,48.84 112.33,52.2 112.33,52.96 D6.2
  Bottom 0.152: 80.17,19.89 74.08,25.98 74.08,26.59 74.38,26.9 74.53,26.9 74.84,27.2 74.84,27.81 74.23,28.42 v72.7,28.42 67.68,23.39 v62.34,23.39 | v108.98,48.84 82.15,22.02 82.15,21.87 80.17,19.89 | 80.17,19.89 83.66,16.4 v83.66,16.38
EPD_DC  (via drill 0.35)
  Top 0.152: v84.9,13.94 84.59,14.25 84.59,15.16 J1.11 | v13.57,11.2 13.27,10.89 12.51,10.89 12.2,10.59 TP11.TP | v12.66,40.31 12.66,41.68 U2.5
  Bottom 0.152: v13.57,11.2 14.03,11.66 | v12.66,40.31 12.66,13.03 14.03,11.66 | v84.9,13.94 84.47,13.94 82.18,11.66 14.03,11.66
EPD_RST  (via drill 0.35)
  Top 0.152: 20.43,2.97 21.35,2.97 21.65,3.28 52.82,3.28 64.53,14.98 v64.96,14.98 | J1.10 85.05,15.32 85.05,15.92 v84.57,16.41 | v13.57,43.36 16.47,46.25 16.47,59.21 U2.21 | v13.57,13.03 13.57,12.11 20.13,5.56 20.13,4.19 20.43,3.88 20.43,2.97 | 20.43,2.97 TP12.TP
  Bottom 0.152: v13.57,13.03 v13.57,43.36 | v64.96,14.98 64.98,15.01 83.17,15.01 v84.57,16.41
FLASH_CS  (via drill 0.35)
  Top 0.152: v56.86,13.64 57.47,13.03 57.47,12.27 58.23,11.5 58.84,11.5 R5.1 | v39.94,30.71 39.33,31.32 38.87,31.32 D9.2 | v37.2,51.89 37.5,51.89 37.96,52.35 U1.1 | v22.41,43.2 21.96,43.2 21.5,42.75 21.5,41.83 U2.12
  Bottom 0.152: v56.86,13.64 39.94,30.56 v39.94,30.71 39.94,40.78 37.98,42.74 37.96,42.74 37.2,43.51 | 37.2,43.51 v37.2,51.89 | v22.41,43.2 23.02,42.59 36.28,42.59 37.2,43.51
GDR
  Top 0.152: J1.2 89.01,15.32 89.01,15.92 85.36,19.58 68.12,19.58 68.11,19.56 67.09,19.56 65.24,21.41 64.78,21.41 R4.1 64.63,21.41 64.32,21.41 62.65,19.73 61.88,19.73 61.43,19.28 61.43,18.67 Q3.1
GND  (via drill 0.35)
  Top 0.152: U2.29_5 13.12,49.15 12.05,49.15 U2.29_2 | U4.6 131.52,55.73 131.2,55.73 131.09,55.84 U4.9 130.29,56.22 130.29,56.3 130,56.59 U4.1 | U2.29_3 12,50.31 | 12,50.31 U2.29_6 | U2.29_6 U2.29_9 U2.29_8 | U2.29_5 13.3,49.06 | 13.3,49.06 U2.29_8 | U2.29_4 U2.29_7 U2.29_8 | U2.29_4 U2.29_1 U2.29_2 | U2.29_2 12,49.14 12,50.31 | U2.29_6 13.17,49.19 13.3,49.06 | U2.29_4 U2.29_5
  other vias: 148.3,51.54 146.8,45.44 141.3,52.74 130.9,52.44 139.2,44.24 117,49.84 118.1,44.84 115.5,53.24 111.7,48.94 117.3,37.54 96.4,46.24 101.2,45.54 103.6,52.74 104,40.24 86.9,38.54 96.5,34.04 79.3,22.24 77.3,21.54 74.1,21.04 55,17.04 52.7,14.44 58.2,14.04 64.1,12.34 61,7.94 38.9,28.04 42.2,30.84 46.1,28.04 45.5,39.44 42.6,44.14 39.1,46.44 33.8,48.04 7.5,38.54 13.5,46.24 7.6,43.44 84.9,49.34 90.8,50.84 94.5,47.14 81.2,17.04 75,12.54 74.7,10.74 71.2,16.04 77.7,12.64 88.1,13.84 89.9,12.24 92.5,10.94 12.3,44.34 69.2,75.84 70.6,45.64 57.7,21.64 46.4,73.34 6.3,75.04 55.7,103.44 92.9,55.74 45,55.74 40.9,26.34 36.7,24.44 63.7,17.24 84.9,18.04 154.4,53.94 123.2,49.84 94.2,45.24 50,74.94
  pour Top: 6.64,38.58 6.62,38.56 0.28,38.56 0.26,38.58 0.08,38.76 0.08,0.07 0.23,-0.08 74.37,-0.08 74.52,0.07 74.52,9.91 74.44,10 74.42,10.02 74.42,10.06 74.44,10.08 74.46,10.1 74.48,10.12 92.82,10.12 92.84,10.1 92.96,9.98 92.98,9.96 92.98,0.02 169.97,0.02 170.02,0.07 170.02,67.06 170.03,67.06 92.38,67.06 92.36,67.08 92.24,67.2 92.22,67.22 92.22,111.06 68.18,111.06 68.18,111.07 68.18,109.12 68.16,109.1 67.94,108.88 67.92,108.86 21.98,108.86 21.96,108.88 21.94,108.9 21.92,108.92 21.92,110.96 0.48,110.96 0.46,110.98 0.28,111.16 0.28,61.32 0.26,61.3 0.11,61.14 0.23,61.02 6.62,61.02 6.64,61 6.66,60.98 6.68,60.96 6.68,38.62 6.66,38.6
  pour Bottom: 6.84,38.18 6.82,38.16 0.28,38.16 0.26,38.18 0.08,38.36 0.08,-0.28 74.17,-0.28 74.52,0.07 74.52,9.96 74.54,9.98 74.56,10 74.58,10.02 92.82,10.02 92.84,10 92.86,9.98 92.88,9.96 92.88,-0.18 169.77,-0.18 170.22,0.27 170.22,66.86 92.38,66.86 92.36,66.88 92.14,67.1 92.12,67.12 92.12,111.06 92.13,111.06 68.23,111.06 68.08,110.91 68.08,108.82 68.06,108.8 68.04,108.78 68.02,108.76 22.18,108.76 22.16,108.78 22.04,108.9 22.02,108.92 22.02,111.16 0.17,111.16 0.18,111.16 0.18,61.62 0.16,61.6 0.08,61.52 6.92,61.52 6.94,61.5 6.96,61.48 6.98,61.46 6.98,38.32 6.96,38.3
GPIO8
  Top 0.152: R1.2 19.06,41.53 18.91,41.68 U2.10
I2C_PW  (via drill 0.35)
  Top 0.152: C1.1 154.39,7.54 151.8,7.54 C2.1 151.65,7.54 151.19,7.54 150.12,8.61 150.12,12.42 SENSOR2.8 150.12,12.57 v150.12,13.79 150.73,14.4 | 150.73,14.4 151.04,14.7 150.89,14.86 150.89,15.32 SENSOR2.2 | 150.73,14.4 151.8,13.33 151.8,12.57 SENSOR2.6 | U2.17 21.35,59.21 21.35,58.6 25,54.94 25,30.71 31.71,24 32.93,24 33.23,24.31 33.23,24.46 34.76,25.98 35.37,25.98 R2-PINH.2 35.52,26.14 35.67,26.29 35.82,26.29 36.28,25.83 36.28,25.64 38.08,23.85 39.63,23.85 54.87,39.09 79.91,39.09 82.05,41.22 82.15,41.22 89.16,48.23 | 89.16,48.23 89.16,48.39 R1_PINH.2 89.16,48.23 | v98.89,35.86 98.89,36.29 97.93,37.25 97.93,40.72 90.41,48.23 89.16,48.23
  Bottom 0.152: v150.12,13.79 121.02,13.79 98.94,35.86 v98.89,35.86
INT_RTC  (via drill 0.35)
  Top 0.152: v36.89,25.68 37.8,24.76 38.42,24.76 R1_PINH1.1 | v16.62,40.46 16.62,41.53 16.47,41.68 U2.8 | v25.61,37.41 25.61,59.82 36.28,70.48 TP15.TP 44.21,62.84 v44.21,62.79 | U3.3 87.03,60.42 87.03,61.49 85.66,62.86 76.57,62.86 v76.54,62.89
  Bottom 0.152: 23.48,35.28 20.74,38.02 17.69,38.02 16.62,39.09 v16.62,40.46 | 23.48,35.28 v25.61,37.41 | v36.89,25.68 34.32,25.68 34.25,25.61 33.15,25.61 23.48,35.28 | v44.21,62.79 44.28,62.86 76.52,62.86 v76.54,62.89
IO/BOOT  (via drill 0.35)
  Top 0.152: C6.1 34.45,106.15 33.69,106.15 32.47,107.36 31.86,107.36 BOOT_BUTTON.3 31.71,107.36 28.36,107.36 BOOT_BUTTON.4 28.2,107.36 26.98,107.36 | 26.98,107.36 26.07,107.36 R_BOOT.2 | v24.09,73.99 24.09,59.36 U2.15 | 26.98,107.36 v26.98,106.91
  Bottom 0.152: v24.09,73.99 24.09,104.01 v26.98,106.91
IO/CHANGE
  Top 0.152: C10.1 49.39,105.99 48.78,105.99 48.02,106.76 48.02,106.91 47.56,107.36 46.95,107.36 CHANGE_BUTTON.3 46.8,107.36 43.44,107.36 CHANGE_BUTTON.4 43.29,107.36 42.99,107.06 41.31,107.06 R_CHANGE.2 41.16,107.21 40.55,107.21 39.48,106.15 39.48,90.3 13.88,64.69 13.88,59.36 U2.23
MISO  (via drill 0.35)
  Top 0.152: v74.69,26.29 73.31,26.29 R8.1 | v81.54,22.17 82.15,21.56 82.15,21.11 D12.2 | 7.02,93.95 7.17,94.11 7.17,102.18 6.26,103.1 TP6.TP | 7.02,93.95 6.87,93.8 5.95,93.8 J4.P7 | v26.22,51.28 37.96,51.28 U1.2 38.11,51.28 38.42,51.28 v38.95,51.81 | v9.31,57.99 8.7,58.6 8.7,59.21 U2.27 | v7.3,92 7.3,93.67 7.02,93.95
  Bottom 0.152: 75.14,26.29 77.43,26.29 v81.54,22.17 | 75.14,26.29 v74.69,26.29 | 75.14,26.29 75.14,27.96 51.37,51.74 39.02,51.74 v38.95,51.81 | v7.3,92 7.3,64.44 6.33,63.47 4.97,63.47 4.43,62.94 4.43,62.69 5.48,61.65 5.65,61.65 v9.31,57.99 9.31,51.69 10.79,50.2 11.75,50.2 12.82,51.28 v26.22,51.28
MOSI  (via drill 0.35)
  Top 0.152: v32.47,32.54 31.86,31.93 31.86,31.47 D11.2 | v18.45,39.55 16.62,39.55 15.1,41.07 15.1,41.68 U2.7 | v4.89,60.97 5.46,61.53 4.73,62.25 4.73,89.08 4.89,89.23 5.8,89.23 J4.P3 | TP7.TP 76.82,96.7 76.82,90.67 v66.15,80.01 | v37.73,37.72 37.73,40.73 45.54,48.54 45.73,48.54 U1.5 45.88,48.54 46.04,48.69 46.04,48.84 v50.15,52.96 50.15,63.86 50.22,63.93 v50.22,64 | v83.07,18.67 83.07,16.65 83.05,16.63 83.05,15.22 J1.14 | v87.74,26.69 87.69,26.75 84.14,26.75 83.72,27.16 R7.1 82.99,27.51 82.04,27.51 v81.12,26.59
  Bottom 0.152: v83.07,18.67 83.07,22.02 v87.74,26.69 | v50.15,52.96 50.61,52.96 76.21,27.35 80.36,27.35 v81.12,26.59 | v66.15,80.01 66.15,79.93 v50.22,64 | v37.73,37.72 37.65,37.72 v32.47,32.54 25.46,39.55 v18.45,39.55 11.19,46.81 9.22,46.81 7.6,45.19 6.55,45.19 6.55,48.84 6.67,48.96 6.67,59.35 6.36,59.65 6.35,59.67 6.35,59.69 6.26,59.78 6.18,59.88 6.16,59.88 6.15,59.89 6.02,59.89 5.96,59.9 v4.89,60.97
N$2  (via drill 0.35)
  Top 0.152: R2-USB1.2 148.45,43.81 148.45,44.42 148.68,44.66 v148.68,44.73 | J2.A5 163.53,53.11 163.07,53.11 154.86,44.9 v150.41,44.9
  Bottom 0.152: v148.68,44.73 150.24,44.73 v150.41,44.9
N$3  (via drill 0.35)
  Top 0.152: v147.08,41.07 147.08,42.14 R2-USB.1 | v160.57,54.2 162.37,56.01 163.53,56.01 J2.B5
  Bottom 0.152: v147.08,41.07 147.44,41.07 v160.57,54.2
N$4
  Top 0.152: 94.04,38.02 93.89,38.02 D3.2 94.04,38.02 | 94.04,38.02 94.35,38.02 95.87,39.55 96.63,39.55 C4.1 | 94.04,38.02 90.38,34.36 90.38,33.75 D4.1
N$6
  Top 0.152: R1_BAT.1 107.3,53.26 107.3,53.87 108.21,54.79 119.19,54.79 119.8,54.18 119.8,52.04 120.1,51.74 120.86,51.74 MCP73831.1
N$7  (via drill 0.35)
  Top 0.152: v158.05,57.53 157.13,57.53 CHG_LED.C | v109.43,53.72 108.82,53.11 108.52,53.11 R1_BAT.2
  Bottom 0.152: v158.05,57.53 134.58,57.53 133.76,56.71 133.2,56.71 132.75,57.16 132.75,57.51 132.39,57.86 131.89,57.86 130.38,56.36 112.07,56.36 v109.43,53.72
N$8
  Top 0.152: R2_BAT.2 114.01,50.82 114.31,50.82 117.21,53.72 117.21,54.18 117.51,54.48 119.03,54.48 119.34,54.18 119.34,53.11 118.12,51.89 118.27,51.74 MCP73831.5
N$9
  Top 0.152: J1.24 78.04,15.16 78.04,14.55 79.26,13.33 88.86,13.33 90.23,14.7 90.23,15.77 86.12,19.89 86.12,20.34 85.96,20.5 EPD_C12.1
N$10  (via drill 0.35)
  Top 0.152: v83.68,20.19 82.92,20.19 82.76,20.04 77.5,20.04 71.56,25.98 71.56,26.06 v70.11,27.51 | v69.66,28.88 69.05,28.27 68.59,28.27 EPD_C2.1 | J1.5 87.64,15.32 87.64,15.94 85.35,18.23 85.09,18.49 85.07,18.49 v84.9,18.67
  Bottom 0.152: v83.68,20.19 84.9,18.97 v84.9,18.67 | v70.11,27.51 70.11,28.42 v69.66,28.88
N$11
  Top 0.152: J1.22 79.11,15.32 79.11,15.92 78.65,16.38 77.58,16.38 77.12,15.92 77.12,14.65 79.05,12.72 89.16,12.72 90.84,14.4 90.84,17.91 88.55,20.19 88.55,20.34 88.71,20.5 EPD_C10.1
N$12  (via drill 0.35)
  Top 0.152: v52.89,97 53.2,97.31 53.2,97.76 53.35,97.92 IC1.5 | C_DELAY.1 41.16,41.68 41.62,41.68 50.83,50.89 50.83,64.26 50.76,64.33 v50.76,80.77
  Bottom 0.152: v52.89,97 50.76,94.87 v50.76,80.77
N$13
  Top 0.152: J1.20 80.02,15.32 80.02,15.92 78.95,16.99 77.28,16.99 76.52,16.23 76.52,14.47 79.33,11.66 90.84,11.66 91.45,12.27 91.45,20.34 EPD_C8.1
N$14
  Top 0.152: J1.19 80.63,15.32 80.63,15.92 79.26,17.3 77.12,17.3 76.21,16.38 76.21,12.27 77.12,11.35 90.99,11.35 92.06,12.42 92.06,19.28 92.67,19.89 92.67,20.34 92.82,20.5 EPD_C7.1
N$15  (via drill 0.35)
  Top 0.152: v81.7,14.25 81.24,14.25 81.09,14.4 81.09,15.16 J1.18 | EPD_C6.1 94.09,20.29 v94.09,19.45
  Bottom 0.152: v81.7,14.25 82.31,13.64 83.3,13.64 85.66,16 90.56,16 94.01,19.45 v94.09,19.45
N$16  (via drill 0.35)
  Top 0.152: v86.73,14.25 87.79,14.25 88.1,14.55 88.1,15.16 J1.4 | EPD_C1.1 66,28.27 65.85,28.12 65.85,25.98 60.67,20.8 60.67,18.06 62.63,16.1 v62.63,15.47
  Bottom 0.152: v86.73,14.25 86.42,14.25 86.12,14.55 84.64,14.55 83.43,13.33 64.78,13.33 62.65,15.47 v62.63,15.47
N$17
  Top 0.152: R_CAPACITOR.2 89.93,63.17 89.93,63.93 88.71,65.15 88.4,65.15 D7.1
PREVGH  (via drill 0.35)
  Top 0.152: 90.23,20.5 90.38,20.34 90.38,19.89 91.14,19.12 91.14,14.25 89.32,12.42 78.96,12.42 76.82,14.56 76.82,16.08 77.43,16.69 78.8,16.69 79.56,15.92 79.56,15.32 J1.21 | v76.82,39.7 76.82,42.9 D5.1 | v84.9,25.68 85.96,25.68 89.47,22.17 89.47,21.26 90.23,20.5 | 90.23,20.5 EPD_C9.1
  Bottom 0.152: v76.82,39.7 76.82,33.75 v84.9,25.68
PREVGL  (via drill 0.35)
  Top 0.152: 87.49,19.89 90.54,16.84 90.54,14.55 89.01,13.03 79.17,13.03 77.43,14.77 77.43,15.77 77.73,16.08 78.34,16.08 78.65,15.77 78.65,15.32 J1.23 | 87.49,19.89 87.49,20.34 87.34,20.5 EPD_C11.1 | v87.34,19.58 87.34,19.73 87.49,19.89 | D4.2 93.74,33.72 v93.74,32.31
  Bottom 0.152: v87.34,19.58 93.74,25.98 v93.74,32.31
RESE  (via drill 0.35)
  Top 0.152: 65.39,19.89 64.32,19.89 62.8,18.36 62.65,18.52 Q3.2 | 65.39,19.89 66.3,19.89 66.94,19.25 68.23,19.25 68.25,19.27 85.2,19.27 88.55,15.92 88.55,15.32 J1.3 | v67.83,22.17 67.52,22.48 66.76,22.48 R3.1 | 65.39,19.89 v65.39,20.04
  Bottom 0.152: v67.83,22.17 67.52,22.17 v65.39,20.04
RESE'  (via drill 0.35)
  Top 0.152: 56.25,14.7 56.25,11.96 56.4,11.81 SJ1.2 | 56.25,14.7 56.25,15.01 R2.2 56.25,14.7 | 56.25,14.7 v57.16,15.62 | R3.2 66.76,21.26 66.76,20.95 67.52,20.19 67.83,20.19 v67.85,20.17
  Bottom 0.152: v67.85,20.17 67.8,20.17 63.74,16.1 57.64,16.1 v57.16,15.62
RESET  (via drill 0.35)
  Top 0.152: C5.1 66.15,105.99 65.54,105.99 65.24,106.3 65.24,106.76 64.63,107.36 64.02,107.36 RESET_BUTTON.3 63.87,107.36 60.51,107.36 RESET_BUTTON.4 60.36,107.36 59.9,107.36 59.45,106.91 | 59.45,106.91 59.14,106.6 59.14,105.84 59.29,105.69 59.29,105.54 51.67,97.92 50.76,97.92 IC1.1 50.61,97.92 50,97.92 49.61,97.53 v49.59,97.53 | 59.45,106.91 58.99,107.36 58.38,107.36 R_RESET.2 | v10.68,61.64 9.61,60.58 6.56,60.58 6.56,46.1 9.92,42.75 9.92,41.83 U2.3
  Bottom 0.152: v49.59,97.53 15.22,63.17 5.09,63.17 5.02,63.09 5.02,62.5 5.57,61.95 10.37,61.95 v10.68,61.64
RTC_RST  (via drill 0.35)
  Top 0.152: v25,58.14 23.02,58.14 22.72,58.44 22.72,59.21 U2.16 | v85.35,58.75 85.81,59.21 85.81,60.27 U3.4
  Bottom 0.152: v25,58.14 84.74,58.14 v85.35,58.75
RX
  Top 0.152: U2.24 12.66,59.36 12.66,64.69 15.86,67.89 15.86,68.81 TP2.TP
SCK  (via drill 0.35)
  Top 0.152: v79.26,14.25 79.87,13.64 82.92,13.64 83.68,14.4 83.68,15.16 J1.13 | 63.56,15.47 63.56,15.92 65.39,17.75 65.39,17.91 65.24,18.06 R6.1 | 36.43,32.84 35.37,31.77 35.37,31.32 D10.2 | v21.04,43.2 14.34,43.2 13.88,42.75 13.88,41.83 U2.6 | J4.P5 5.8,91.36 4.89,91.36 4.43,90.91 4.43,61.92 v4.75,61.6 | TP8.TP 71.64,96.54 65.24,90.14 v65.24,80.01 | 63.56,15.47 62.95,14.86 58.84,14.86 50.91,22.78 v46.49,22.78 | 36.43,32.84 v36.36,32.84 | 63.56,15.47 v63.53,15.49 | v37.73,42.14 38.11,42.14 44.21,48.23 44.21,48.39 45.12,49.3 45.43,49.3 45.73,49.61 45.73,49.91 U1.6 45.73,50.06 46.19,50.52 46.34,50.52 49.62,53.8 49.62,64.31 50.15,64.84 v50.15,64.91 | 36.43,32.84 36.43,39.78 v36.36,39.85
  Bottom 0.152: v79.26,14.25 64.78,14.25 v63.53,15.49 | 36.43,39.85 37.65,41.07 37.65,42.06 v37.73,42.14 | 36.43,39.85 35.52,40.77 23.94,40.77 21.5,43.2 v21.04,43.2 15.73,48.51 10.49,48.51 8.37,50.63 8.37,55.88 6.94,57.3 6.94,59.56 4.97,61.53 4.81,61.53 v4.75,61.6 | v46.49,22.78 36.43,32.84 v36.36,32.84 | v36.36,39.85 36.43,39.85 | v50.15,64.91 v65.24,80 v65.24,80.01
SCL  (via drill 0.35)
  Top 0.152: R2-PINH.1 35.37,24.92 34.3,24.92 33.08,23.7 31.56,23.7 24.7,30.56 24.7,51.43 v24.24,51.89 17.54,58.6 17.54,59.21 U2.20 | 133.55,54.9 132.29,56.16 132.14,56.01 131.68,56.01 U4.7 | 133.55,54.9 145.7,42.75 v145.7,39.7 | J3.4 164.3,20.8 164.3,21.11 v163.69,21.72 157.44,15.47 152.56,15.47 SENSOR2.4 | v90.38,48.84 89.62,49.61 89.62,50.98 U3.16 89.62,51.13 89.62,52.04 89.01,52.65 85.35,52.65 83.53,54.48 v83.07,54.48 | 133.55,54.9 v132.8,54.14
  Bottom 0.152: v163.69,21.72 v145.7,39.7 | v90.38,48.84 106.39,48.84 111.69,54.14 v132.8,54.14 | v24.24,51.89 33.08,51.89 35.67,54.48 v83.07,54.48
SD0805S020S1R0
  Top 0.152: 116.44,40.77 116.75,40.46 117.36,40.46 IC4.3 | 116.44,40.77 116.44,41.83 117.05,42.44 117.21,42.44 117.36,42.29 IC4.1 | 112.33,37.26 112.48,37.26 C1_BAT1.1 112.33,37.26 | 112.33,37.26 112.18,37.26 101,26.08 87.49,26.08 87.29,26.29 81.67,26.29 81.37,25.99 80.87,25.99 80.66,26.2 Q1.2 | 113.09,40.16 113.09,38.33 112.33,37.56 112.33,37.26 | 116.44,40.77 114.16,40.77 113.55,40.16 113.09,40.16 | 113.09,40.16 D2.1
SDA  (via drill 0.35)
  Top 0.152: 141.44,47.47 146.31,42.59 146.31,21.56 151.8,16.08 151.8,15.47 SENSOR2.3 | 141.44,47.47 132.29,56.62 131.68,56.62 U4.8 | 87.95,48.69 87.95,49.45 88.1,49.61 | 87.95,48.69 87.95,48.54 R1_PINH.1 87.95,48.69 | 88.1,49.61 88.25,49.76 88.25,50.98 U3.15 | v23.94,55.09 22.26,55.09 18.91,58.44 18.91,59.21 U2.19 | v74.69,55.09 81.09,48.69 87.95,48.69 | v88.86,49.45 88.25,49.45 88.1,49.61 | v141.76,47.76 141.72,47.76 141.44,47.47
  Bottom 0.152: v74.69,55.09 v23.94,55.09 | v88.86,49.45 106.08,49.45 112.48,55.85 132.9,55.85 133.41,55.35 133.41,53.06 139.91,46.56 140.52,46.56 141.72,47.76 v141.76,47.76
SRC  (via drill 0.35)
  Top 0.152: v81.39,42.75 80.48,42.75 80.33,42.9 D5.2 | C4.2 v83.22,40.92 83.22,39.37 L1.1 80.93,38.48 79.11,38.48 72.86,32.23 72.86,31.16 69.2,27.51 68.13,27.51 62.04,21.41 62.04,20.8 Q3.3
  Bottom 0.152: v81.39,42.75 v83.22,40.92
SS_SD  (via drill 0.35)
  Top 0.152: v39.33,38.17 43.9,42.75 44.36,42.75 D8.2 | R10.1 32.32,24.92 32.93,24.92 34,25.98 v34,26.21 | v17.99,38.63 13.42,38.63 11.29,40.77 11.29,41.68 U2.4 11.29,41.83 11.29,50.99 v11.17,51.11 | J4.P2 6.41,88.16 7.17,88.16 7.48,87.86 7.48,64.69 v5.48,62.69
  Bottom 0.152: 34,31.93 34,32.84 v39.33,38.17 | v17.99,38.63 25.46,38.63 32.17,31.93 34,31.93 | v11.17,51.11 20.62,60.57 20.62,67.64 15.68,62.69 v5.48,62.69 | 34,31.93 v34,26.21
TX
  Top 0.152: U2.25 11.29,59.36 11.29,66.83 12.35,67.89 12.35,68.35 TP1.TP
USB_D+  (via drill 0.35)
  Top 0.152: v24.09,43.81 24.09,41.83 U2.14 | D1.1 146.62,49.91 145.86,49.91 144.94,49 141.76,49 v133.45,57.31
  Bottom 0.152: v24.09,43.81 25.46,43.81 35.52,53.87 84.74,53.87 87.95,57.07 130.67,57.07 131.76,58.17 132.52,58.17 133.37,57.31 v133.45,57.31
USB_D-  (via drill 0.35)
  Top 0.152: v23.33,43.2 22.72,42.59 22.72,41.83 U2.13 | D1.3 146.62,48.08 146.01,48.08 145.58,48.51 v145.58,48.72
  Bottom 0.152: v23.33,43.2 25.31,43.2 35.67,53.57 50.45,53.57 55.79,48.23 106.23,48.23 109.15,51.15 127.89,51.15 132.79,46.25 141.13,46.25 143.57,48.69 145.55,48.69 v145.58,48.72
VBAT  (via drill 0.35)
  Top 0.305: TP3.TP 74.23,31.01 71.94,28.73 71.94,26.14 72.7,25.37 76.21,25.37 76.67,25.83 76.67,26.2 77.37,26.9 78.74,26.9 78.98,27.15 Q1.3 80.35,27.28 82.12,29.05 | U4.3 129.69,55.65 129.69,55.69 U4.2 129.55,55.96 129.45,55.96 v127.03,53.54 | 122.08,53.26 121.62,53.72 121.02,53.72 MCP73831.3 | 122.08,53.26 123.08,52.26 123.08,51.37 119.49,47.78 118.88,47.78 C2_BAT.1 118.73,47.78 118.19,47.78 117.74,47.32 v117.66,47.32 | v110.5,40.16 97.55,27.2 88.3,27.2 88.19,27.2 88.1,27.2 87.31,28 v84.64,28 84.7,28.05 | 122.08,53.26 122.16,53.34 v122.16,53.42 | 82.17,29 82.12,29.05 | 82.12,29.05 82.39,29.05 v82.74,28.7
  Bottom 0.305: v122.16,53.42 122.23,53.42 122.36,53.54 v127.03,53.54 | v117.66,47.32 v110.5,40.16 | v82.74,28.7 83.45,28 v84.64,28
VBUS  (via drill 0.35)
  Top 0.305: 151.5,51.74 151.34,51.89 C5_USB.1 151.5,51.74 | CHG_LED.A 156.98,56.01 155.71,56.01 153.87,54.16 153.87,54.11 151.5,51.74 | 147.53,47.32 146.01,47.32 144.94,48.39 144.48,48.39 C4_USB.1 144.26,48.54 141.23,48.54 v141.03,48.74 | 147.53,47.32 148.14,47.93 148.14,48.69 148.6,49.15 149.21,49.15 D1.5 149.36,49.15 150.12,49.15 150.28,49.3 150.28,50.52 151.5,51.74 | 126.35,54.94 126.81,54.94 129.09,57.23 132.11,57.23 v132.14,57.26 | 126.35,54.94 124.98,54.94 C1_BAT.1 | 147.53,47.32 149.36,45.49 149.36,41.53 148.6,40.77 148.6,39.39 PFMF.050.1.2 | 101.66,34.06 110.2,42.59 110.35,42.59 110.5,42.44 R1_PWRUSB.2 110.65,42.44 112.94,42.44 D2.2 113.09,42.44 113.24,42.59 113.24,48.23 114.46,49.45 | 101.66,34.06 99.22,31.62 81.47,31.62 Q1.1 | 114.46,49.45 118.27,53.26 118.27,53.57 MCP73831.4 | 101.66,34.06 98.31,37.41 98.31,41.88 90.14,50.05 90.14,52.1 89.21,53.03 85.51,53.03 83.38,55.17 83.3,55.17 59.52,78.94 59.44,78.94 58.46,79.92 TP14.TP | 114.46,49.45 117.28,46.64 119.12,46.64 120.71,48.23 127.63,48.23 128.44,49.04 128.44,50.71 126.35,52.8 126.35,54.94
  Bottom 0.305: v141.03,48.74 140.63,48.74 132.14,57.23 v132.14,57.26
VRTC  (via drill 0.35)
  Top 0.305: 92.36,52.2 96.02,52.2 96.17,52.35 CPH3225A.1 | 92.36,52.2 92.06,52.2 C8.1 92.36,52.2 | 92.36,52.2 91.14,53.42 | 91.14,53.42 87.64,56.92 87.64,61.49 88.55,62.41 88.55,63.02 R_CAPACITOR.1 | v87.03,49.3 87.03,50.98 U3.14 | 91.14,53.42 v90.99,53.26
  Bottom 0.305: v90.99,53.26 v87.03,49.3
VUSB  (via drill 0.35)
  Top 0.305: PFMF.050.1.1 143.99,37.05 145,36.04 v145,35.94 | J2.B4 J2.A9 163.5,56.74 162.5,56.74 162.2,57.04 v161.3,57.04 | J2.A4 J2.B9 162.51,52.05 161.8,51.34 v161.8,50.54 161.8,48.44 v148.4,35.04
  Bottom 0.305: v161.3,57.04 161.8,56.54 v161.8,50.54 | v145,35.94 147.5,35.94 v148.4,35.04